# EAGLE board output (EAGLE 7.6.0)
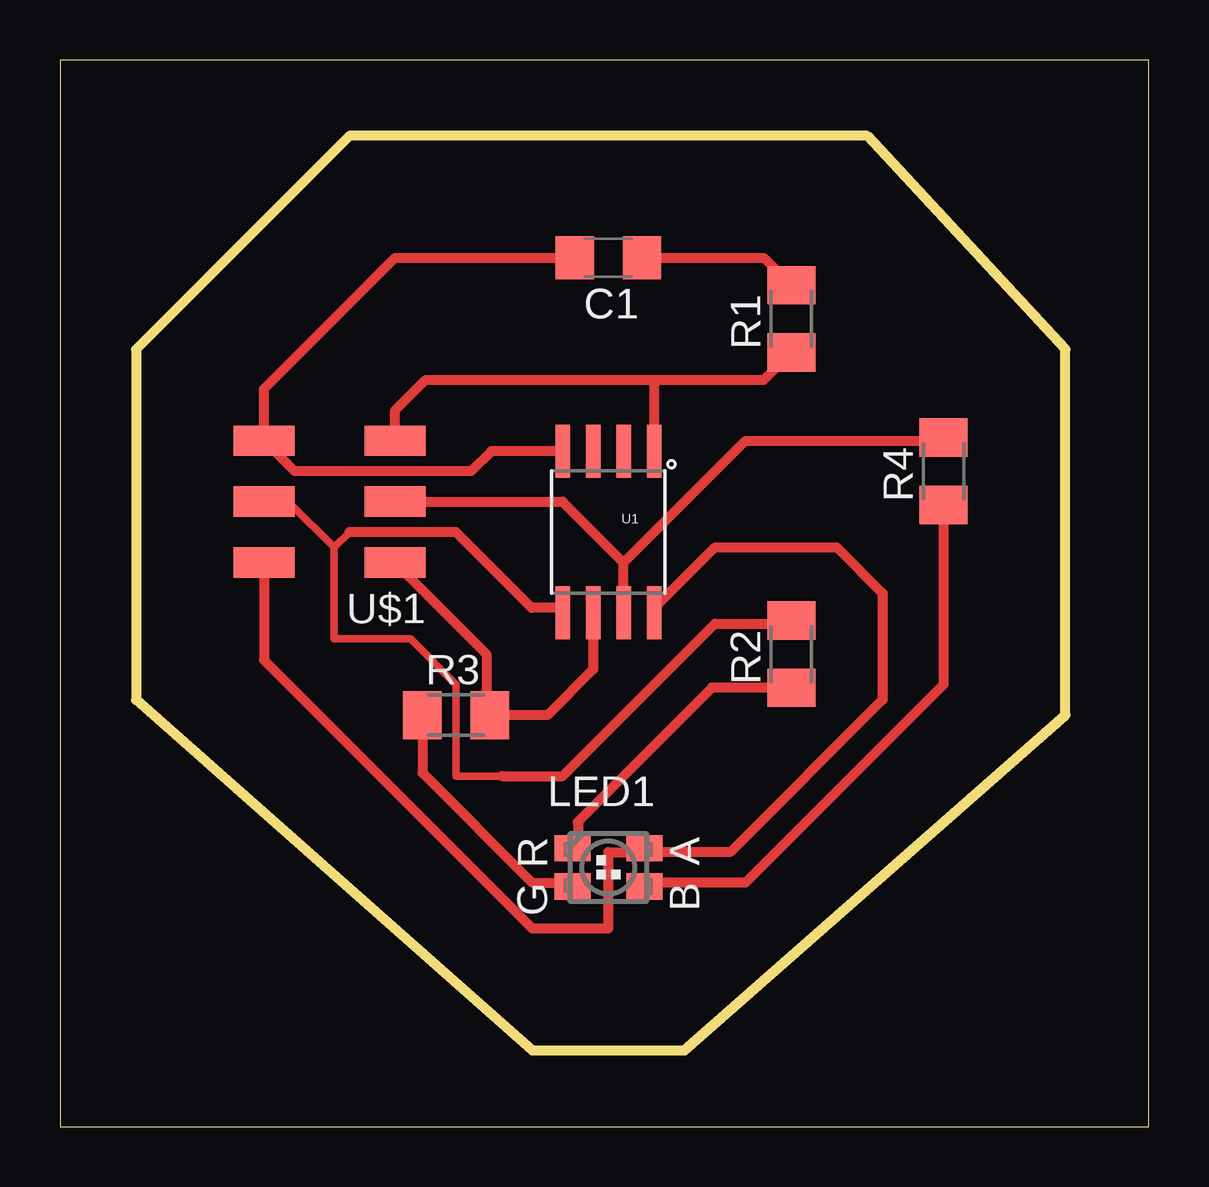
[diagram p0: board, top side]

Size 45.39 x 44.44 mm. Coordinates in mm from the lower left corner, seen from the top.
Outline: 0,0 45.39,0 45.39,44.44 0,44.44 0,0
Outline: 33.66,41.27 12.06,41.27 3.17,32.38 3.17,17.78 19.68,3.17 26.04,3.17 41.91,17.14 41.91,32.38 33.66,41.27
Copper layers (1*16): Top 0.035mm / dielectric 1.5mm / Bottom 0.035mm
Design rules "default *": minimum track width 10mil, minimum drill 24mil, track to track 16mil, track to pad 16mil, pad to pad 16mil, via to via 16mil, smd to smd 16mil, copper to edge 40mil, drill to drill 8mil, minimum pad ring 10mil, minimum via ring 8mil, stop-mask expansion 4mil, vias tented up to drill 0mil, thermal gap 10mil

## Footprints (pad centres in the part's own frame; a part is rotated, then mirrored left to right if it is on the bottom)
C1206 = smd 1.6 x 1.8: 1 -1.4,0; 2 1.4,0
P-LCC-4-3 = smd 1.1 x 1.5: A -0.8,1.5; B 0.8,1.5; G 0.8,-1.5; R -0.8,-1.5
M1206 = smd 1.6 x 2: 1 -1.4,0; 2 1.4,0
SO08-EIAJ = smd 0.61 x 2.21: 1 -1.905,-3.378; 2 -0.635,-3.378; 3 0.635,-3.378; 4 1.905,-3.378; 5 1.905,3.353; 6 0.635,3.353; 7 -0.635,3.353; 8 -1.905,3.353
2X03SMD = smd 2.54 x 1.27: 1 -2.54,2.54; 2 2.92,2.54; 3 -2.54,0; 4 2.92,0; 5 -2.54,-2.54; 6 2.92,-2.54

## Placement (x,y rotation side)
C1  CAP-US1206  [C1206]  22.86,36.2 180 top
LED1  [P-LCC-4-3]  22.86,10.79 270 top
R1  10k  [M1206]  30.48,33.66 90 top
R2  1k  [M1206]  30.48,19.68 90 top
R3  1k  [M1206]  16.51,17.14 0 top
R4  499  [M1206]  36.83,27.3 90 top
U1  Tiny45-20-SMT  [SO08-EIAJ]  22.86,24.77 180 top
U$1  AVRISPSMD  [2X03SMD]  11.43,26.04 180 top

## Library data of the parts
C1 LED1 U$1 = fab
R1-R4 = resistor
U1 = SparkFun-DigitalIC; PROD_ID: IC-08922

## Nets
GND: C1.2 U1.4 U$1.6
MISO: R3.2 U1.6 U$1.1
MOSI: R2.2 U1.5 U$1.4
N$1: C1.1 R1.2
N$3: LED1.R R2.1
N$4: U1.2
N$5: U1.3
N$6: LED1.G R3.1
N$10: LED1.B R4.1
RST: R1.1 U1.1 U$1.5
SCK: R4.2 U1.7 U$1.3
VCC: LED1.A U1.8 U$1.2

## Tracks (layer width: path | path; a pad name or v marks a point on that pad's centre or on a via)
GND
  Top 0.406: C1.2 13.97,36.2 8.51,30.73 U$1.6 9.78,27.3 17.14,27.3 17.98,28.14 U1.4
MISO
  Top 0.406: U1.6 22.23,19.05 20.32,17.14 R3.2 17.78,17.27 17.78,19.68 U$1.1
MOSI
  Top 0.254: 8.64,25.96 U$1.4 | 20.75,21.61 U1.5
  Top 0.305: 8.64,25.96 9.6,25.96 11.43,24.13 | 11.43,24.13 11.43,20.32 14.61,20.32 16.51,18.41 16.51,14.61 18.41,14.61 | 12.06,24.77 11.43,24.13
  Top 0.406: 20.75,21.61 19.66,21.61 16.51,24.77 12.06,24.77 | 18.41,14.61 20.95,14.61 27.3,20.95 30.35,20.95 R2.2
N$1
  Top 0.406: C1.1 29.34,36.2 R1.2
N$3
  Top 0.406: R2.1 27.18,18.29 21.59,12.7 21.59,11.83 LED1.R
N$6
  Top 0.406: R3.1 15.11,14.74 19.68,10.16 21.2,10.16 LED1.G
N$10
  Top 0.406: R4.1 36.83,18.41 28.57,10.16 24.52,10.16 LED1.B
RST
  Top 0.406: U$1.5 13.97,29.84 15.24,31.12 24.77,31.12 | 24.77,31.12 U1.1 | 24.77,31.12 29.34,31.12 R1.1
SCK
  Top 0.254: 23.5,21.61 U1.7
  Top 0.406: 23.5,21.61 23.5,23.49 | 23.5,23.49 28.57,28.57 36.7,28.57 R4.2 | U$1.3 20.95,26.04 23.5,23.49
VCC
  Top 0.406: U1.8 24.77,21.59 27.3,24.13 32.38,24.13 34.29,22.22 34.29,17.78 27.94,11.43 24.52,11.43 LED1.A 24.2,11.43 22.86,11.43 22.86,8.26 19.68,8.26 8.51,19.43 U$1.2